# Altium PCB PCB1.PcbDoc
Units mm, origin at the board's own origin, x right, y up, seen from the top; angles counter-clockwise.
Board outline 70.87 x 14.35 mm, 2 copper layers (Top Layer 1, Bottom Layer 1); 2 components, 2 nets, 106 pads, 0 vias.
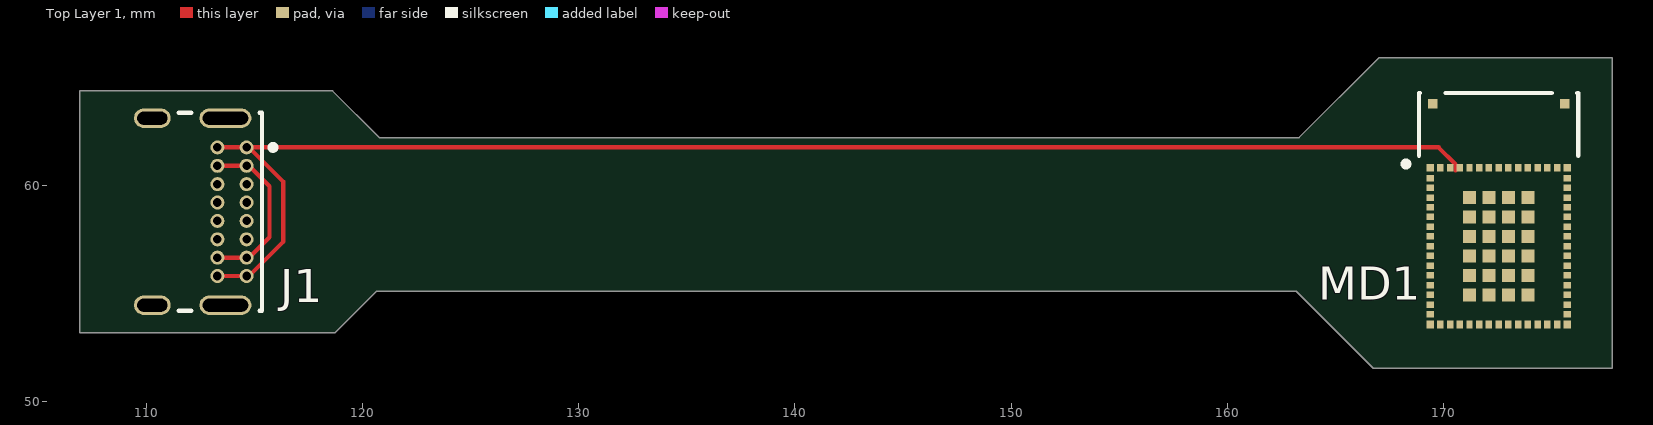
[diagram p0: Top Layer 1 view]
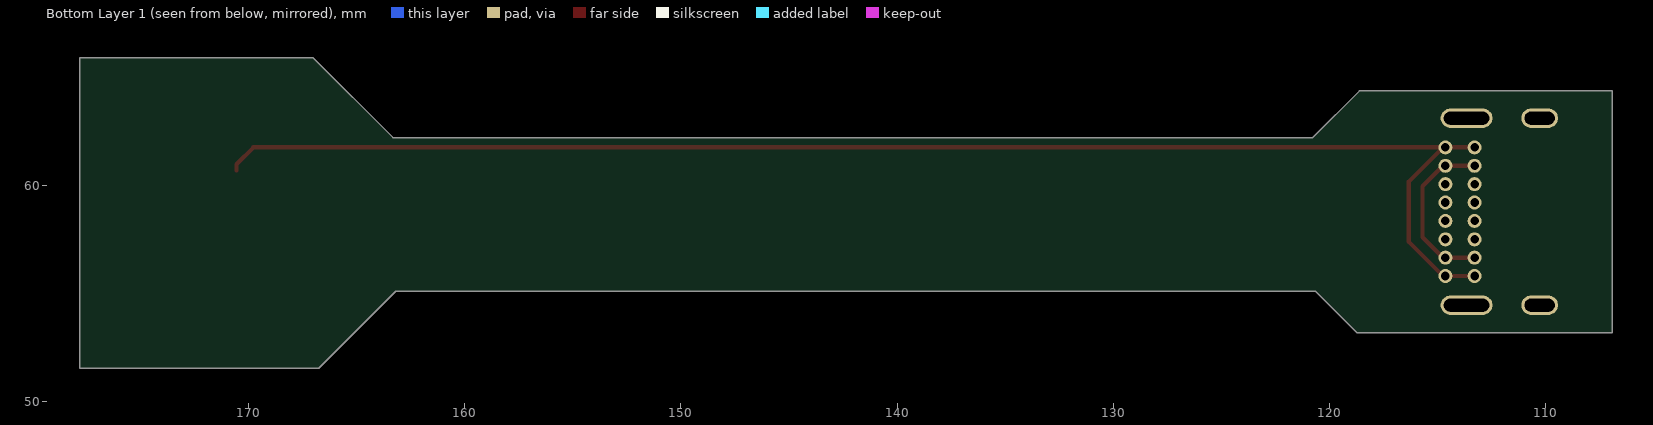
[diagram p1: Bottom Layer 1 view, seen from below]

## Layer stack, top to bottom
Top Solder: solder mask 0.012, FC-001, Dk 4
Top Solder: solder mask 0.0102, Solder Resist, Dk 3.5
Top Layer 1: signal copper 0.0356
Dielectric 1: dielectric 0.32, FR-4, Dk 4.8
Bottom Layer 1: signal copper 0.0356
Flex Bottom Coverlay: solder mask 0.0102, Solder Resist, Dk 3.5
Flex Bottom Coverlay: solder mask 0.012, FC-001, Dk 4

## Board outline
118.745,53.213 120.65,55.118 163.195,55.118 166.751,51.562 177.8,51.562 177.8,65.913 167.005,65.913 163.322,62.23 120.777,62.23 118.618,64.389 106.934,64.389 106.934,53.213
board region rigidstm: 167.513,65.913 177.8,65.913 177.8,51.562 167.513,51.562
board region flex: 167.513,51.562 166.751,51.562 163.195,55.118 120.65,55.118 118.745,53.213 116.981,53.213 117.08,64.389 118.618,64.389 120.777,62.23 163.322,62.23 167.005,65.913 167.513,65.913
board region rigidusb: 116.981,53.213 106.934,53.213 106.934,64.389 117.08,64.389

## Design rules (kind name [scope] priority, off if disabled: settings)
Clearance [All] p1: gap=0.254 ignorepadtopadclearanceinfootprint=FALSE
DiffPairsRouting [All] p1: maxlimit=0.254 minlimit=0.254 mostfreqgap=0.254 toplayer_minwidth=0.381 toplayer_maxwidth=0.381 toplayer_prefwidth=0.381 bottomlayer_minwidth=0.381 bottomlayer_maxwidth=0.381 bottomlayer_prefwidth=0.381 substack1={0007E02A-49F8-44E4-B981-B74486B74FEC} toplayer_{0007e02a-49f8-44e4-b981-b74486b74fec}_minwidth=0.381 toplayer_{0007e02a-49f8-44e4-b981-b74486b74fec}_maxwidth=0.381 toplayer_{0007e02a-49f8-44e4-b981-b74486b74fec}_prefwidth=0.381 bottomlayer_{0007e02a-49f8-44e4-b981-b74486b74fec}_minwidth=0.381 bottomlayer_{0007e02a-49f8-44e4-b981-b74486b74fec}_maxwidth=0.381 bottomlayer_{0007e02a-49f8-44e4-b981-b74486b74fec}_prefwidth=0.381 maxuncoupledlength=12.7
PolygonConnect [All] p1: connectstyle=Relief reliefconductorwidth=0.254 reliefentries=4 polygonreliefangle="90 Angle" airgapwidth=0.254
RoutingVias [All] p1: holewidth=0.711 width=1.27 viastyle="Through Hole" minholewidth=0.711 minwidth=1.27 maxholewidth=0.711 maxwidth=1.27
SolderMaskExpansion [All] p1: expansion=0.102 istentingtop=FALSE
Width [All] p1: maxlimit=1 minlimit=0.1 preferedwidth=0.2 substack1={0007E02A-49F8-44E4-B981-B74486B74FEC} toplayer_{0007e02a-49f8-44e4-b981-b74486b74fec}_minwidth=0.254 toplayer_{0007e02a-49f8-44e4-b981-b74486b74fec}_maxwidth=0.254 toplayer_{0007e02a-49f8-44e4-b981-b74486b74fec}_prefwidth=0.254 bottomlayer_{0007e02a-49f8-44e4-b981-b74486b74fec}_minwidth=0.254 bottomlayer_{0007e02a-49f8-44e4-b981-b74486b74fec}_maxwidth=0.254 bottomlayer_{0007e02a-49f8-44e4-b981-b74486b74fec}_prefwidth=0.254 minimp=50.000000 maximp=50.000000 favimp=50.000000
29 further rules are at their usual default settings.

## Components (designator, comment, footprint, x,y, rotation, side; value= is the part's Value field where it differs from the comment)
J1 "USB4085-GF-A" FP-USB4085-GF-A-MFG 110.617,58.801 r270 top
MD1 "STM32WB5MMGH6TR" FP-STM32WB5MMGH6TR-MFG 172.557,58.758 r0 top

## Footprints (in the part's own frame and the unit in brackets; to place one, negate y for a bottom-side part, rotate by r counter-clockwise, add the part's x,y. Pads: shape width x height; smd on the part's side, far side on the other; paste and mask are expansions set on the pad)
FP-STM32WB5MMGH6TR-MFG [mm]
  rect 0.35x0.35 smd paste+0 mask+0: 1(-3.175,2.075) 17(-3.175,-5.175) 31(3.175,-5.175) 47(3.175,2.075)
  rect 0.35x0.3 smd paste+0 mask+0: 2(-3.175,1.6) 3(-3.175,1.15) 4(-3.175,0.7) 5(-3.175,0.25) 6(-3.175,-0.2) 7(-3.175,-0.65) 8(-3.175,-1.1) 9(-3.175,-1.55) 10(-3.175,-2) 11(-3.175,-2.45) 12(-3.175,-2.9) 13(-3.175,-3.35) 14(-3.175,-3.8) 15(-3.175,-4.25) 16(-3.175,-4.7) 32(3.175,-4.7) 33(3.175,-4.25) 34(3.175,-3.8) 35(3.175,-3.35) 36(3.175,-2.9) 37(3.175,-2.45) 38(3.175,-2) 39(3.175,-1.55) 40(3.175,-1.1) 41(3.175,-0.65) 42(3.175,-0.2) 43(3.175,0.25) 44(3.175,0.7) 45(3.175,1.15) 46(3.175,1.6)
  rect 0.3x0.35 smd paste+0 mask+0: 18(-2.7,-5.175) 19(-2.25,-5.175) 20(-1.8,-5.175) 21(-1.35,-5.175) 22(-0.9,-5.175) 23(-0.45,-5.175) 24(0,-5.175) 25(0.45,-5.175) 26(0.9,-5.175) 27(1.35,-5.175) 28(1.8,-5.175) 29(2.25,-5.175) 30(2.7,-5.175) 48(2.7,2.075) 49(2.25,2.075) 50(1.8,2.075) 51(1.35,2.075) 52(0.9,2.075) 53(0.45,2.075) 54(0,2.075) 55(-0.45,2.075) 56(-0.9,2.075) 57(-1.35,2.075) 58(-1.8,2.075) 59(-2.25,2.075) 60(-2.7,2.075)
  rect 0.6x0.6 smd paste+0 mask+0: 61(-1.35,0.7) 62(-1.35,-0.2) 63(-1.35,-1.1) 64(-1.35,-2) 65(-1.35,-2.9) 66(-1.35,-3.8) 67(-0.45,-3.8) 68(0.45,-3.8) 69(1.35,-3.8) 70(1.35,-2.9) 71(1.35,-2) 72(1.35,-1.1) 73(1.35,-0.2) 74(1.35,0.7) 75(0.45,0.7) 76(-0.45,0.7) 77(-0.45,-0.2) 78(-0.45,-1.1) 79(-0.45,-2) 80(-0.45,-2.9) 81(0.45,-2.9) 82(0.45,-2) 83(0.45,-1.1) 84(0.45,-0.2)
  rect 0.43x0.43 smd paste+0 mask+0: 85(-3.05,5.035) 86(3.05,5.035)
  silkscreen extent -4.41,2.13 3.69,5.54, body extent -4.19,-6.04 4.19,6.04, height 0.25
FP-USB4085-GF-A-MFG [mm]
  rrect100% 0.9x2.4 hole 2.1 slot 0.6 at 0 deg paste-2539.97 mask+0: 1(-4.325,3.045) 2(4.325,3.045)
  rrect100% 0.9x1.7 hole 1.4 slot 0.6 at 0 deg paste-2539.97 mask+0: 3(-4.325,-0.335) 4(4.325,-0.335)
  round 0.65 hole 0.4 paste-2539.97 mask+0: A1(-2.975,4.025) A4(-2.125,4.025) A5(-1.275,4.025) A6(-0.425,4.025) A7(0.425,4.025) A8(1.275,4.025) A9(2.125,4.025) A12(2.975,4.025) B1(2.975,2.675) B4(2.125,2.675) B5(1.275,2.675) B6(0.425,2.675) B7(-0.425,2.675) B8(-1.275,2.675) B9(-2.125,2.675) B12(-2.975,2.675)
  silkscreen extent -4.57,0.89 4.57,5.37, body extent -4.87,-4.83 4.87,4.83, height 0.25

## Part data
J1: library part CMP-196119-000001-2, "CONN RCPT USB2.0 TYPE C 24POS RA", Contact Material="Copper Alloy", Contact Plating=Gold, Gender=Receptacle, Number of Positions=16, Orientation="Right Angle", USB Standard="USB 2.0"
MD1: library part CMP-12160-000017-1, "ULTRA-LOW-POWER DUAL CORE ARM CO"

## Nets (pads, with @x,y where several pads share a name; then routed paths per layer and width w, separated by ;. In a path a pad name is that pad's centre, name@x,y a point inside that pad or via, vN(x,y) a via of type N, cw(c..) or ccw(c..) an arc to the next point about the centre after c; other vN are vias at no path point)
+5V: J1.A4 J1.A9 J1.B4 J1.B9 | length 8
  Top Layer 1 w0.2: J1.B4 J1.A9 114.752,56.676 115.697,57.621 115.697,59.981 114.752,60.926 J1.A4 J1.B9
GND: J1.A1 J1.A12 J1.B1 J1.B12 MD1.58 MD1.59 | length 66.6
  Top Layer 1 w0.2: J1.B1 J1.A12 114.752,55.826 116.332,57.406 116.332,60.196 J1.A1@114.752,61.776 ; J1.B12 J1.A1 J1.A1@114.752,61.776 ; 170.561,60.706 170.561,60.993 169.778,61.776 J1.A1@114.752,61.776
pads on no net: J1.1 J1.2 J1.3 J1.4 J1.A5 J1.A6 J1.A7 J1.A8 J1.B5 J1.B6 J1.B7 J1.B8 MD1.1 MD1.2 MD1.3 MD1.4 MD1.5 MD1.6 MD1.7 MD1.8 MD1.9 MD1.10 MD1.11 MD1.12 MD1.13 MD1.14 MD1.15 MD1.16 MD1.17 MD1.18 MD1.19 MD1.20 MD1.21 MD1.22 MD1.23 MD1.24 MD1.25 MD1.26 MD1.27 MD1.28 MD1.29 MD1.30 MD1.31 MD1.32 MD1.33 MD1.34 MD1.35 MD1.36 MD1.37 MD1.38 MD1.39 MD1.40 MD1.41 MD1.42 MD1.43 MD1.44 MD1.45 MD1.46 MD1.47 MD1.48 MD1.49 MD1.50 MD1.51 MD1.52 MD1.53 MD1.54 MD1.55 MD1.56 MD1.57 MD1.60 MD1.61 MD1.62 MD1.63 MD1.64 MD1.65 MD1.66 MD1.67 MD1.68 MD1.69 MD1.70 MD1.71 MD1.72 MD1.73 MD1.74 MD1.75 MD1.76 MD1.77 MD1.78 MD1.79 MD1.80 MD1.81 MD1.82 MD1.83 MD1.84 MD1.85 MD1.86